# EAGLE board BMS Slave changes_vf (EAGLE 9.6.2)
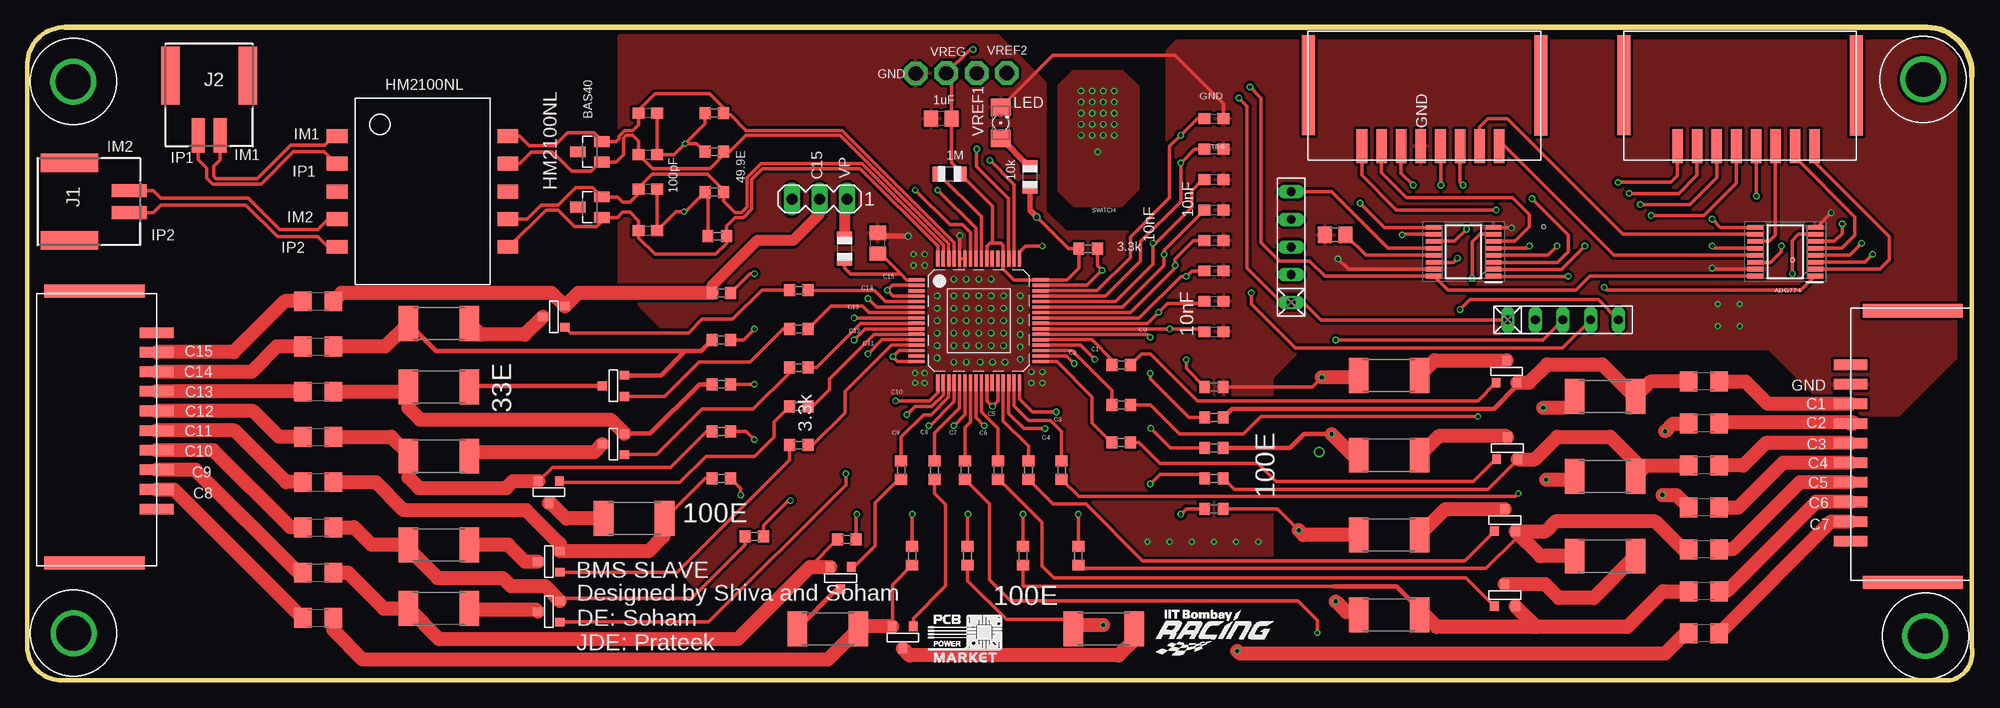
[diagram p0: board, top side]
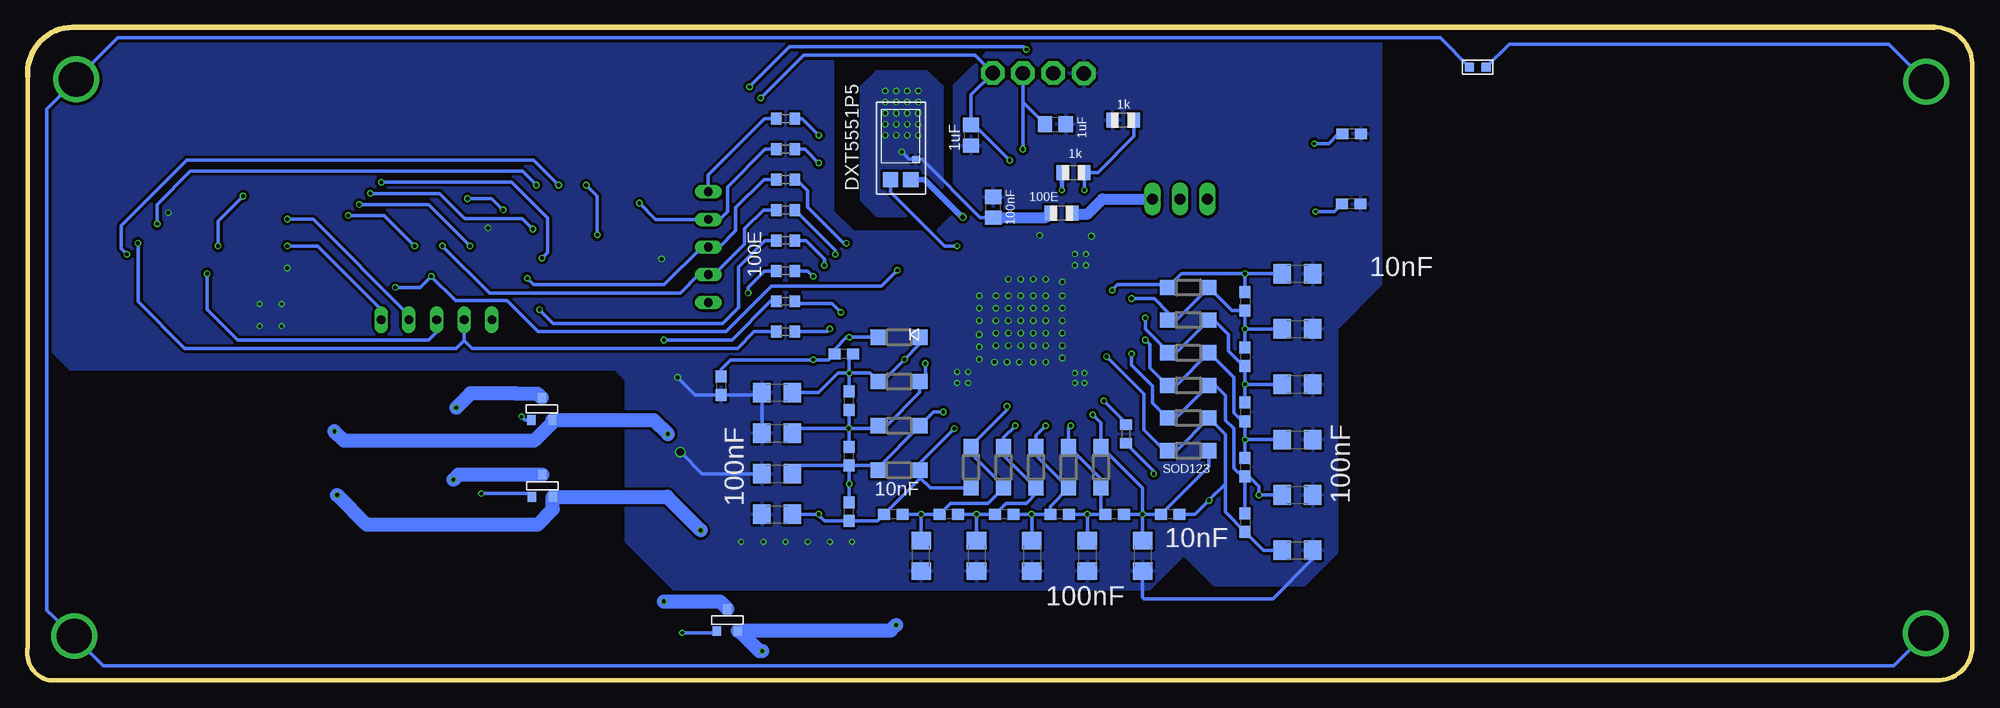
[diagram p1: board, bottom side, seen from below]

Size 178.49 x 59.96 mm. Coordinates in mm from the lower left corner, seen from the top.
Outline: 3.49,59.94 173.92,59.94 arc-100 178.43,55.37 178.43,3.05 arc-90 176.46,0 3.24,0 arc-90 0,3.05 0,56.64 arc-90 3.49,59.94
Copper layers (1*16): Top 0.035mm / dielectric 1.5mm / Bottom 0.035mm
Design rules "PCB_Power": minimum track width 5mil, minimum drill 10mil, track to track 5mil, track to pad 5mil, pad to pad 5mil, via to via 5mil, smd to smd 5mil, copper to edge 10mil, drill to drill 6mil, minimum pad ring 5mil, minimum via ring 5mil, stop-mask expansion 3mil, vias tented up to drill 0mil, thermal gap 10mil

## Footprints (pad centres in the part's own frame; a part is rotated, then mirrored left to right if it is on the bottom)
C0805 = smd 1.3 x 1.5: 1 -0.95,0; 2 0.95,0
C0603 = smd 1.1 x 1: 1 -0.85,0; 2 0.85,0
SOD123 = smd 1.4 x 1.4: A 1.9,0; C -1.9,0
SOP64P600X175-16N = smd 1.52 x 0.44: 1 -2.715,2.24; 2 -2.715,1.6; 3 -2.715,0.96; 4 -2.715,0.32; 5 -2.715,-0.32; 6 -2.715,-0.96; 7 -2.715,-1.6; 8 -2.715,-2.24; 9 2.715,-2.24; 10 2.715,-1.6; 11 2.715,-0.96; 12 2.715,-0.32; 13 2.715,0.32; 14 2.715,0.96; 15 2.715,1.6; 16 2.715,2.24
R0603 = smd 1 x 1.1: 1 -0.85,0; 2 0.85,0
C1206 = smd 1.6 x 1.8: 1 -1.4,0; 2 1.4,0
SOT23 = smd 1 x 1.4: 1 -0.95,-1.1; 2 0.95,-1.1; 3 0,1.1
5023520200 = smd 1.2 x 3.2: 1 -1,-1; 2 1,-1 | smd 1.7 x 5.3: 3 -3.55,-6.48; 4 3.55,-6.48
1206 = smd 1.6 x 1.803: A -1.422,0; C 1.422,0
SOT-23 = smd 0.787 x 0.889: 1 0.025,-1.016; 2 -0.94,1.016; 3 0.991,1.016
R2512 = smd 1.8 x 3.2: 1 -2.8,0; 2 2.8,0
R0805 = smd 1.1 x 1.4: 1 -1,0; 2 1,0
R0603' = smd 0.889 x 0.889: 1 0,0.762; 2 0,-0.762
R0805' = smd 1.3 x 1.5: 1 -0.95,0; 2 0.95,0
RN-5 = drill 0.813 long: 1 -5.08,0; 2 -2.54,0; 3 0,0; 4 2.54,0; 5 5.08,0
MA03-1 = drill 1.016 long: 1 -2.54,0; 2 0,0; 3 2.54,0
P1-13 = drill 1.321 pad 2.159 octagon: TP 0,0
HM2100NL = smd 1.27 x 1.89: 1 -5.08,-7.84; 2 -2.54,-7.84; 3 0,-7.84; 4 2.54,-7.84; 5 5.08,-7.84; 6 5.08,7.84; 7 2.54,7.84; 8 0,7.84; 9 -2.54,7.84; 10 -5.08,7.84
DXT5551P5 = smd 1.4 x 1.39: B -0.9,-1.534; E 0.94,-1.534 | smd 0.635 x 0.635: C 1.384,0.33
LTC6813 = smd 1.5 x 0.3: C0 5.7,-1.25; C1 5.7,-2.25; C2 5.7,-3.25; C11 -5.7,-3.75; C12 -5.7,-2.75; C13 -5.7,-1.75; C14 -5.7,-0.75; C15 -5.7,0.25; C16 -5.7,1.25; C17 -5.7,2.25; C18 -5.7,3.25; GPIO1 5.7,-0.75; GPIO2 5.7,-0.25; GPIO3 5.7,0.25; GPIO4 5.7,0.75; GPIO5 5.7,1.25; GPIO6 5.7,1.75; GPIO7 5.7,2.25; GPIO8 5.7,2.75; GPIO9 5.7,3.25; S1 5.7,-1.75; S2 5.7,-2.75; S3 5.7,-3.75; S12 -5.7,-3.25; S13 -5.7,-2.25; S14 -5.7,-1.25; S15 -5.7,-0.25; S16 -5.7,0.75; S17 -5.7,1.75; S18 -5.7,2.75; V+ -5.7,3.75; VREG 5.7,3.75 | smd 0.3 x 1.5: C3 3.75,-5.7; C4 2.75,-5.7; C5 1.75,-5.7; C6 0.75,-5.7; C7 -0.25,-5.7; C8 -1.25,-5.7; C9 -2.25,-5.7; C10 -3.25,-5.7; CSB(IMA) -2.25,5.7; DRIVE 3.75,5.7; DTEN 2.25,5.7; IBIAS -0.25,5.7; ICMP -0.75,5.7; IMB -3.25,5.7; IPB -3.75,5.7; ISOMB 0.75,5.7; S4 3.25,-5.7; S5 2.25,-5.7; S6 1.25,-5.7; S7 0.25,-5.7; S8 -0.75,-5.7; S9 -1.75,-5.7; S10 -2.75,-5.7; S11 -3.75,-5.7; SCK(IPA) -2.75,5.7; SDI(NC) 1.75,5.7; SDO(NC) 1.25,5.7; V- -1.75,5.7; V-- -1.25,5.7; VREF1 2.75,5.7; VREF2 3.25,5.7; WDT 0.25,5.7
1X10NANOMQS = smd 0.97 x 3.1: P$1 -1.8,0; P$2 0,0; P$3 1.8,0; P$4 3.6,0; P$5 5.4,0; P$6 7.2,0; P$7 9,0; P$8 10.8,0; P$9 12.6,0; P$10 14.4,0 | smd 1.2 x 9.2: P$11 -6.75,5.7; P$12 18.2,5.7
NEWBMS = smd 0.97 x 3.1: P$1 17.54,1.28; P$2 15.74,1.28; P$3 13.94,1.28; P$4 12.14,1.28; P$5 10.34,1.28; P$6 8.54,1.28; P$7 6.74,1.28; P$8 4.94,1.28 | smd 1.2 x 9.2: P$9 0.016,6.89; P$10 21.352,6.858
1206' = smd 1.6 x 1.8: 1 -1.4,0; 2 1.4,0

## Placement (x,y rotation side)
C1  1uF  [C0805]  83.88,51.56 180 top
C2  100pF  [C0603]  56.96,41.27 0 top
C3  100pF  [C0603]  56.96,45.09 180 top
C4  10nF  [C0603]  56.98,43.74 180 bottom
C5  100pF  [C0603]  56.96,48.26 0 top
C6  100pF  [C0603]  56.96,52.07 180 top
C8  10nF  [C0603]  56.96,50.16 180 bottom
C173  100nF  [C0805]  89.85,43.43 90 bottom
C175  1uF  [C0805]  84.14,51.05 0 bottom
C176  100nF  [C0805]  78.04,40.13 90 top
C177  1uF  [C0805]  91.88,50.04 270 bottom
D1  [SOD123]  98.49,31.5 180 bottom
D2  [SOD123]  98.49,27.43 180 bottom
D3  [SOD123]  98.49,23.37 180 bottom
D4  [SOD123]  98.49,19.3 180 bottom
D5  [SOD123]  91.88,19.56 270 bottom
D7  [SOD123]  88.9,19.56 270 bottom
D8  [SOD123]  85.91,19.56 270 bottom
D9  [SOD123]  82.93,19.56 270 bottom
D10  [SOD123]  79.94,19.56 270 bottom
D11  [SOD123]  71.94,21.08 0 bottom
D12  [SOD123]  71.94,24.08 0 bottom
D13  [SOD123]  71.94,27.08 0 bottom
D14  [SOD123]  71.94,30.07 0 bottom
D15  [SOD123]  71.94,33.07 0 bottom
D16  [SOD123]  71.94,36.07 0 bottom
DEMUX1  ADG774ABRQZ  [SOP64P600X175-16N]  131.81,39.34 180 top
DEMUX2  ADG774ABRQZ  [SOP64P600X175-16N]  161.33,39.34 180 top
E0  100E  [R0603]  108.9,26.92 180 top
E1  100E  [R0603]  108.9,24.13 180 top
E2  100E  [R0603]  108.9,21.34 180 top
E3  100E  [R0603]  108.9,18.54 180 top
E4  100E  [R0603]  108.9,15.75 180 top
E5  100E  [R0603]  96.45,11.43 90 top
E7  100E  [R0603]  91.37,11.43 90 top
E8  100E  [R0603]  86.29,11.43 90 top
E9  100E  [R0603]  81.21,11.43 90 top
E10  100E  [R0603]  75.22,12.93 0 top
E11  100E  [R0603]  66.74,13.21 0 top
E12  100E  [R0603]  63.69,18.54 0 top
E13  100E  [R0603]  63.69,22.86 0 top
E14  100E  [R0603]  63.69,27.18 0 top
E15  100E  [R0603]  63.69,31.24 0 top
E16  100E  [R0603]  63.69,35.56 0 top
E18  100E  [R0603]  108.9,40.39 0 bottom
E19  100E  [R0603]  108.9,37.59 0 bottom
E20  100E  [R0603]  108.9,34.8 0 bottom
E21  100E  [R0603]  108.9,32 0 bottom
E22  100E  [R0603]  108.9,43.18 0 bottom
E23  100E  [R0603]  108.9,45.97 0 bottom
E24  100E  [R0603]  108.9,48.77 0 bottom
E25  100E  [R0603]  108.9,51.56 0 bottom
F1  100nF  [C1206]  109.66,26.42 0 bottom
F2  100nF  [C1206]  109.66,22.69 0 bottom
F3  100nF  [C1206]  109.66,18.97 0 bottom
F4  100nF  [C1206]  109.66,15.24 0 bottom
F5  100nF  [C1206]  96.45,11.43 90 bottom
F7  100nF  [C1206]  91.37,11.43 270 bottom
F8  100nF  [C1206]  86.29,11.43 270 bottom
F9  100nF  [C1206]  81.21,11.43 270 bottom
F10  100nF  [C1206]  76.13,11.43 270 bottom
F11  100nF  [C1206]  61.91,11.94 0 bottom
F12  100nF  [C1206]  61.91,17.02 0 bottom
F13  100nF  [C1206]  61.91,22.1 0 bottom
F14  100nF  [C1206]  61.91,27.18 0 bottom
F15  100nF  [C1206]  61.91,32.26 0 bottom
F16  100nF  [C1206]  61.91,37.34 0 bottom
IM1  BAS40-05  [SOT23]  51.62,48.51 90 top
IM2  BAS40-05  [SOT23]  51.62,43.43 90 top
J1  502352-0200  [5023520200]  10.35,43.94 270 top
J2  502352-0200  [5023520200]  16.7,49.02 180 top
K1  3.3K  [R0603]  100.39,28.96 0 top
K2  3.3K  [R0603]  100.39,25.27 0 top
K3  3.3K  [R0603]  100.39,21.84 0 top
K4  3.3K  [R0603]  94.93,19.3 270 top
K5  3.3K  [R0603]  91.88,19.3 270 top
K7  3.3K  [R0603]  89.09,19.3 90 top
K8  3.3K  [R0603]  86.04,19.3 90 top
K9  3.3K  [R0603]  83.25,19.3 90 top
K10  3.3K  [R0603]  80.2,19.3 90 top
K11  3.3K  [R0603]  77.66,22.62 90 bottom
K12  3.3K  [R0603]  70.8,21.59 0 top
K13  3.3K  [R0603]  70.8,25.15 0 top
K14  3.3K  [R0603]  70.8,28.7 0 top
K15  3.3K  [R0603]  70.8,32.26 0 top
K16  3.3K  [R0603]  70.8,35.81 180 top
K17  3.3K  [R0603]  97.34,39.62 180 top
LED1  [1206]  89.34,51.18 90 top
M1  [SOT-23]  135.77,28.35 180 top
M2  [SOT-23]  131.25,24.92 180 bottom
M3  [SOT-23]  135.85,21.31 180 top
M4  [SOT-23]  131.2,17.86 180 bottom
M5  [SOT-23]  135.62,14.71 180 top
M7  [SOT-23]  135.62,7.82 180 top
M8  [SOT-23]  114.21,5.54 180 bottom
M9  [SOT-23]  80.33,3.94 0 top
M10  [SOT-23]  74.61,9.4 0 top
M11  [SOT-23]  47.86,6.35 270 top
M12  [SOT-23]  47.86,10.92 270 top
M13  [SOT-23]  47.83,17.27 0 top
M14  [SOT-23]  53.78,21.72 270 top
M15  [SOT-23]  53.78,27.05 270 top
M16  [SOT-23]  48.32,33.4 270 top
P0  33E  [R2512]  124.97,27.99 180 top
P1  33E  [R2512]  144.79,26.06 0 top
P2  33E  [R2512]  124.97,20.67 180 top
P3  33E  [R2512]  144.79,18.73 0 top
P4  33E  [R2512]  124.97,13.34 180 top
P6  33E  [R2512]  144.79,11.4 180 top
P7  33E  [R2512]  124.97,6.02 0 top
P8  33E  [R2512]  98.79,4.72 180 top
P9  33E  [R2512]  73.47,4.72 0 top
P10  33E  [R2512]  37.78,6.6 180 top
P11  33E  [R2512]  37.78,12.45 180 top
P12  33E  [R2512]  55.69,14.86 0 top
P13  33E  [R2512]  37.78,20.57 180 top
P14  33E  [R2512]  37.78,26.92 180 top
P15  33E  [R2512]  37.78,32.77 180 top
R1  5k  [R0805]  92.01,46.23 270 top
R2  OE  [R0603']  45.37,56.29 90 bottom
R3  100K  [R0805']  120.03,40.89 180 top
R157  100E  [R0805]  83.58,42.9 0 bottom
R159  1k  [R0805]  82.48,46.61 180 bottom
R160  1k  [R0805]  77.91,51.44 0 bottom
R161  100E  [R0805]  74.99,39.62 90 top
R162  1M  [R0805]  84.64,46.48 0 top
RM1  49.9E  [R0603]  63.05,44.83 180 top
RM2  49.9E  [R0603]  63.31,40.77 0 top
RM3  49.9E  [R0603]  63.05,48.51 0 top
RM4  49.9E  [R0603]  63.05,52.07 180 top
RN2  10k  [RN-5]  140.93,33.1 0 top
RN3  10k  [RN-5]  115.99,39.78 90 top
SV1  [MA03-1]  72.7,44.2 180 top
T0  10nF  [C0603]  114.82,27.05 270 bottom
T1  10nF  [C0603]  103.57,29.97 180 bottom
T2  10nF  [C0603]  103.06,25.65 90 bottom
T3  10nF  [C0603]  103.06,20.57 90 bottom
T4  10nF  [C0603]  103.06,15.49 90 bottom
T5  10nF  [C0603]  98.99,15.24 180 bottom
T7  10nF  [C0603]  93.91,15.24 180 bottom
T8  10nF  [C0603]  88.83,15.24 180 bottom
T9  10nF  [C0603]  83.75,15.24 180 bottom
T10  10nF  [C0603]  78.67,15.24 180 bottom
T11  10nF  [C0603]  73.59,15.24 180 bottom
T12  10nF  [C0603]  66.74,14.48 270 bottom
T13  10nF  [C0603]  66.74,19.56 270 bottom
T14  10nF  [C0603]  66.74,24.64 270 bottom
T15  10nF  [C0603]  66.74,29.72 270 bottom
T16  10nF  [C0603]  66.74,34.8 270 bottom
T18  10nF  [C0603]  108.9,40.39 0 top
T19  10nF  [C0603]  108.9,37.59 0 top
T20  10nF  [C0603]  108.9,34.8 0 top
T21  10nF  [C0603]  108.9,32 0 top
T22  10nF  [C0603]  108.9,43.18 0 top
T23  10nF  [C0603]  108.9,45.97 0 top
T24  10nF  [C0603]  108.9,48.77 0 top
T25  10nF  [C0603]  108.9,51.56 0 top
TP1  TPPAD1-13  [P1-13]  89.88,55.75 0 top
TP6  TPPAD1-13  [P1-13]  84.33,55.74 0 top
TP7  TPPAD1-13  [P1-13]  87.12,55.74 0 top
TP8  TPPAD1-13  [P1-13]  81.53,55.73 0 top
U$1  HM2100NL  [HM2100NL]  36.28,44.88 270 top
U$2  DXT5551P5  [DXT5551P5]  98.36,47.5 0 bottom
U$3  LTC6813  [LTC6813]  87.31,33.02 0 top
U$4  [IITBR_LOGO]  103.52,2.22 0 top
U$5  1X10NANOMQS  [1X10NANOMQS]  11.87,17.53 90 top
U$6  1X10NANOMQS  [1X10NANOMQS]  167.32,27.18 270 top
U$7  LOGO_PCBPOWER  [270X170]  82.61,1.65 0 top
U$8  NEWBMS  [NEWBMS]  117.54,47.75 0 top
U$9  PTC-FUSE  [1206']  26.68,34.8 0 top
U$10  NEWBMS  [NEWBMS]  146.49,47.75 0 top
U$13  PTC-FUSE  [1206']  26.68,30.65 0 top
U$14  PTC-FUSE  [1206']  26.68,26.5 0 top
U$15  PTC-FUSE  [1206']  26.68,22.34 0 top
U$16  PTC-FUSE  [1206']  26.68,18.19 0 top
U$17  PTC-FUSE  [1206']  26.68,14.04 0 top
U$18  PTC-FUSE  [1206']  26.68,9.89 0 top
U$19  PTC-FUSE  [1206']  26.68,5.74 0 top
U$20  PTC-FUSE  [1206']  153.86,4.32 180 top
U$21  PTC-FUSE  [1206']  153.86,8.17 180 top
U$23  PTC-FUSE  [1206']  153.86,12.02 180 top
U$24  PTC-FUSE  [1206']  153.86,15.87 180 top
U$25  PTC-FUSE  [1206']  153.86,19.73 180 top
U$26  PTC-FUSE  [1206']  153.86,23.58 180 top
U$27  PTC-FUSE  [1206']  153.86,27.43 180 top

## Library data of the parts
C1 C173 C175-C177 R1 R157 R159-R162 = IIT_BOMBAY_Racing
C2-C6 C8 T0 T1-T5 T7-T16 T18-T25 = resistor; MID: GCD188R71H103KA01D
D1-D5 D7-D16 IM1 IM2 = diode
DEMUX1 DEMUX2 = SamacSys_Parts; DESCRIPTION: ADG774ABRQZ analogue switch, QSOP16 Analog Devices ADG774ABRQZ, Analogue Switch Quad 2:1, 3.3 V, 5 V, 16-Pin QSOP; HEIGHT: 1.75mm; MANUFACTURER_NAME: Analog Devices; MANUFACTURER_PART_NUMBER: ADG774ABRQZ; MOUSER_PART_NUMBER: 584-ADG774ABRQZ; MOUSER_PRICE-STOCK: https://www.mouser.co.uk/ProductDetail/Analog-Devices/ADG774ABRQZ?qs=BpaRKvA4VqET7XGcXCMwIA%3D%3D
E0 E1-E5 E7-E16 E18-E25 = resistor; MID: MCT06030C1000FP500
F1-F5 F7-F16 = rcl; SPICEPREFIX: C
J1 J2 = SamacSys_Parts; DESCRIPTION: Molex DURACLIK 502352, 2mm Pitch, 2 Way, 1 Row, Right Angle PCB Header, Surface Mount; HEIGHT: mm; MANUFACTURER_NAME: Molex; MANUFACTURER_PART_NUMBER: 502352-0200; MOUSER_PART_NUMBER: 538-502352-0200; MOUSER_PRICE-STOCK: https://www.mouser.co.uk/ProductDetail/Molex/502352-0200?qs=cPOO8qjhL6OPJnOOkJoW%252Bw%3D%3D
K1-K5 K7-K17 = resistor; MID: CRCW06033K30FKEB
LED1 = led
M1-M5 M7-M16 = zetex; MID: BSS308PEH6327XT; OC_FARNELL: unknown; OC_NEWARK: unknown
P0 P1-P4 P6-P15 = resistor; MID: CRCW251233R0FKEGHP
R2 = IIT_BOMBAY_Racing (2)
R3 = rcl; SPICEPREFIX: R
RM1-RM4 = resistor; MID: CRCW0603120RFKEAHP
RN2 RN3 = resistor-net; MID: 4605X-101-103LF; OC_FARNELL: unknown; OC_NEWARK: unknown
SV1 = con-lstb; OC_FARNELL: unknown; OC_NEWARK: unknown
TP1 TP6-TP8 = testpad
U$1 = HM2100NL
U$2 = DXT5551P5
U$3 = 6813
U$4 = Rachit IITB Racing
U$5 U$6 = IIT_BOMBAY_Racing2
U$7 = logo_pcbpower
U$8 U$10 = NEWBMS
U$9 U$13-U$21 U$23-U$27 = IIT_BOMBAY_Racing; MID: 0466.200NRHF

## Nets
C: C173.1 R157.1 U$2.C
C01: E1.1 M1.2 P1.2 U$27.2
C02: E2.1 M2.2 P2.2 U$26.2
C03: E3.1 M3.2 P3.2 U$25.2
C04: E4.1 M4.2 P4.2 U$24.2
C05: E5.1 M5.2 P6.2 U$23.2
C06: E7.1 M7.2 P7.2 U$21.2
C07: E8.1 M8.2 P8.2 U$20.2
C08: E9.1 M9.2 P9.2 U$19.2
C09: E10.1 M10.2 P10.2 U$18.2
C10: E11.1 M11.2 P11.2 U$17.2
C11: E12.1 M12.2 P12.2 U$16.2
C12: E13.1 M13.2 P13.2 U$15.2
C13: E14.1 M14.2 P14.2 U$14.2
C14: E15.1 M15.2 P15.2 U$13.2
C15: E16.1 M16.2 SV1.2 U$9.2
C_01: U$6.P$3 U$27.1
C_02: U$6.P$4 U$26.1
C_03: U$6.P$5 U$25.1
C_04: U$6.P$6 U$24.1
C_05: U$6.P$7 U$23.1
C_06: U$6.P$8 U$21.1
C_07: U$6.P$9 U$20.1
C_08: U$5.P$2 U$19.1
C_09: U$5.P$3 U$18.1
C_10: U$5.P$4 U$17.1
C_11: U$5.P$5 U$16.1
C_12: U$5.P$6 U$15.1
C_13: U$5.P$7 U$14.1
C_14: U$5.P$8 U$13.1
C_15: U$5.P$9 U$9.1
C_17: D16.C E16.2 F16.1 T16.1 U$3.C17 U$3.C18
C_18: D15.C D16.A E15.2 F15.1 T15.1 T16.2 U$3.C16
C_20: D14.C D15.A E14.2 F14.1 T14.1 T15.2 U$3.C15
C_21: K10.1 M10.3
C_22: D13.C D14.A E13.2 F13.1 T13.1 T14.2 U$3.C14
C_23: D9.C D10.A E9.2 F9.1 T9.1 T10.2 U$3.C9
C_24: D12.C D13.A E12.2 F12.1 T12.1 T13.2 U$3.C13
C_26: D8.C D9.A E8.2 F8.1 T8.1 T9.2 U$3.C8
C_27: D10.C D11.A E10.2 F10.1 T10.1 T11.2 U$3.C10
C_28: D11.C D12.A E11.2 F11.1 T11.1 T12.2 U$3.C11 U$3.C12
C_30: D7.C D8.A E7.2 F7.1 T7.1 T8.2 U$3.C7
C_33: D5.C D7.A E5.2 F5.2 T5.1 T7.2 U$3.C5 U$3.C6
C_35: D4.C D5.A E4.2 F4.2 T4.1 T5.2 U$3.C4
C_37: D3.C D4.A E3.2 F3.2 T3.1 T4.2 U$3.C3
C_38: D2.C D3.A E2.2 F2.2 T2.1 T3.2 U$3.C2
C_41: D1.A E0.2 T0.1 T1.2 U$3.C0
C_42: D1.C D2.A E1.2 F1.2 T1.1 T2.2 U$3.C1
D13: K13.2 U$3.S14
GND: C1.2 C4.1 C8.1 C173.2 C175.2 C176.2 C177.2 DEMUX1.8 DEMUX1.15 DEMUX2.8 DEMUX2.15 E0.1 F1.1 F2.1 F3.1 F4.1 F5.1 F7.2 F8.2 F9.2 F10.2 F11.2 F12.2 F13.2 F14.2 F15.2 F16.2 LED1.C P0.2 R3.2 R160.1 T0.2 T18.2 T19.2 T20.2 T21.2 T22.2 T23.2 T24.2 T25.2 TP8.TP U$3.V- U$3.V-- U$6.P$2 U$8.P$5
GND1: R2.1
GND2: R2.2
ISO_1_IN_N: C3.2 IM2.2 RM1.1 U$1.7 U$3.IMB
ISO_1_IN_P: C2.1 IM2.1 RM2.2 U$1.6 U$3.IPB
ISO_1_N: J1.1 U$1.4
ISO_1_P: J1.2 U$1.5
ISO_2_IN_N: C6.2 IM1.2 RM4.1 U$1.10 U$3.CSB(IMA)
ISO_2_IN_P: C5.1 IM1.1 RM3.2 U$1.9 U$3.SCK(IPA)
ISO_2_N: J2.1 U$1.1
ISO_2_P: J2.2 U$1.2
N$2: DEMUX1.13 R3.1
N$3: C2.2 C3.1 C4.2 RM1.2 RM2.1
N$6: K15.2 U$3.S16
N$7: C5.2 C6.1 C8.2 RM3.1 RM4.2
N$8: R162.1 U$3.WDT
N$9: E18.2 T18.1 U$3.GPIO4
N$10: E19.2 T19.1 U$3.GPIO3
N$11: E20.2 T20.1 U$3.GPIO2
N$12: E21.2 T21.1 U$3.GPIO1
N$13: K8.2 U$3.S8
N$14: R159.1 R160.2 U$3.ICMP
N$17: E23.2 T23.1 U$3.GPIO6
N$18: E24.2 T24.1 U$3.GPIO7
N$19: E25.2 T25.1 U$3.GPIO8
N$22: E22.2 T22.1 U$3.GPIO5
N$25: K16.2 M16.3
N$31: M16.1 P15.1
N$37: K15.1 M15.3
N$41: M15.1 P14.1
N$47: K14.1 M14.3
N$52: M14.1 P13.1
N$54: K13.1 M13.3
N$55: M13.1 P12.1
N$58: K12.1 M12.3
N$59: M12.1 P11.1
N$60: K11.1 M11.3
N$61: M11.1 P10.1
N$65: M10.1 P9.1
N$68: K9.1 M9.3
N$69: M9.1 P8.1
N$72: M8.1 P7.1
N$74: K7.2 U$3.S7
N$75: M7.1 P6.1
N$76: K16.1 U$3.S17
N$81: K5.2 M5.3
N$82: M5.1 P4.1
N$83: K2.1 U$3.S2
N$84: K4.2 M4.3
N$85: M4.1 P3.1
N$87: K3.2 M3.3
N$88: M3.1 P2.1
N$90: K2.2 M2.3
N$91: M2.1 P1.1
N$94: K1.2 M1.3
N$95: M1.1 P0.1
N$97: K14.2 U$3.S15
N$99: K12.2 U$3.S13
N$100: K11.2 U$3.S11
N$101: K10.2 U$3.S10
N$102: K9.2 U$3.S9
N$103: K8.1 M8.3
N$104: K7.1 M7.3
N$106: K5.1 U$3.S5
N$107: K4.1 U$3.S4
N$108: K3.1 U$3.S3
N$110: K1.1 U$3.S1
N$227: U$2.B U$3.DRIVE
N$241: R159.2 U$3.IBIAS
N$246: C176.1 R161.1 U$3.V+
P_TEMP1: DEMUX2.2 U$10.P$1
P_TEMP2: DEMUX2.5 U$10.P$2
P_TEMP3: DEMUX2.11 U$10.P$3
P_TEMP4: DEMUX2.14 U$10.P$4
P_TEMP5: DEMUX1.2 U$10.P$5
P_TEMP6: DEMUX1.5 U$10.P$6
P_TEMP7: DEMUX1.11 U$10.P$7
P_TEMP8: DEMUX1.14 U$10.P$8
P_TEMP9: DEMUX2.3 U$8.P$4
P_TEMP10: DEMUX2.6 U$8.P$3
P_TEMP11: DEMUX2.10 U$8.P$2
P_TEMP12: DEMUX2.13 U$8.P$1
P_TEMP13: DEMUX1.3 U$8.P$8
P_TEMP14: DEMUX1.6 U$8.P$7
P_TEMP15: DEMUX1.10 U$8.P$6
R: LED1.A R1.1
SWITCH_TEMP: DEMUX1.1 DEMUX2.1 K17.1 U$3.GPIO9
TEMP1: DEMUX2.4 E21.1 RN2.2
TEMP2: DEMUX2.7 E20.1 RN2.3
TEMP3: DEMUX2.9 E19.1 RN2.4
TEMP4: DEMUX2.12 E18.1 RN2.5
TEMP5: DEMUX1.4 E22.1 RN3.2
TEMP6: DEMUX1.7 E23.1 RN3.3
TEMP7: DEMUX1.9 E24.1 RN3.4
TEMP8: DEMUX1.12 E25.1 RN3.5
VP: R157.2 R161.2 SV1.1
VREF1: C175.1 TP7.TP U$3.VREF1
VREF2: C177.1 RN2.1 RN3.1 TP1.TP U$3.VREF2
VREG: C1.1 DEMUX1.16 DEMUX2.16 K17.2 R1.2 R162.2 TP6.TP U$2.E U$3.DTEN U$3.ISOMB U$3.VREG

## Tracks (layer width: path | path; a pad name or v marks a point on that pad's centre or on a via)
C  (via drill 0.35)
  Bottom 0.305: v98.23,48.51 97.55,47.83 U$2.C 96.39,47.83 91.05,42.48 C173.1
  Bottom 1.016: C173.1 89.84,42.49 84.98,42.49 R157.1
  other vias: 98.74,52.07 99.76,52.07 96.71,53.09 97.72,52.07 97.72,51.05 98.74,51.05 99.76,51.05 97.72,50.04 98.74,50.04 96.71,50.04 99.76,50.04 99.76,53.09 98.74,53.09 97.72,53.09 99.76,54.1 98.74,54.1 97.72,54.1 96.71,54.1 96.71,51.05 96.71,52.07
  pour Top (isolate 0.254): 95.95,55.88 100.52,55.88 101.92,54.48 101.92,45.09 100.39,43.56 96.07,43.56 94.68,44.96 94.68,54.61
  pour Bottom (isolate 0.254): 95.95,55.88 100.52,55.88 101.92,54.48 101.92,44.07 100.52,42.67 95.95,42.67 94.55,44.07 94.55,54.48
C01
  Top 0.406: E1.1 110.54,24.92 134.58,24.92 136.71,27.05 M1.2
  Top 1.27: U$27.2 | U$27.2 148.96,27.43 P1.2 147.48,26.06 144.54,29.01 139.48,29.01 137.8,27.33 M1.2
C02  (via drill 0.35, 0.35 pad 0.6)
  Top 0.406: v119.69,22.61 117.16,22.61 115.89,21.34 E2.1
  Top 1.27: U$26.2 151.02,23.58 v150.3,22.86 | P2.2 121.63,20.67 v119.69,22.61
  Bottom 0.406: M2.2 130.31,23.65
  Bottom 1.27: M2.2 120.99,23.9 v119.69,22.61 | 130.31,23.65 131.98,21.98 149.43,21.98 v150.3,22.86
C03
  Top 0.305: E3.1 110.77,17.53 134.02,17.53 M3.2
  Top 1.27: M3.2 138.34,20.3 140.4,22.35 145.27,22.35 147.59,20.04 P3.2 148.59,19.73 U$25.2
C04  (via drill 0.35 pad 0.6)
  Top 0.305: v116.68,13.77 114.7,15.75 E4.1
  Top 1.27: v116.68,13.77 117.11,13.34 P4.2 | v150.05,17.02 151.31,17.02 U$24.2
  Bottom 1.27: v150.05,17.02 147.32,14.29 131.67,14.29 130.26,15.7 M4.2 119.76,16.84 v116.68,13.77
C05
  Top 0.305: E5.1 96.78,10.26 133.87,10.26 136.56,12.95 M5.2
  Top 1.27: U$23.2 151.95,12.02 149.4,14.58 140.24,14.58 139.36,13.69 M5.2 138.85,11.41 P6.2
C06
  Top 0.305: E7.1 91.37,8.69 91.45,8.61 119.93,8.61
  Top 0.406: 119.93,8.61 125.65,8.61 127.93,6.33 127.93,6.18 P7.2
  Top 1.27: 138.47,4.9 146.83,4.9 150.1,8.17 U$21.2 | M7.2 138.47,4.9 | 138.47,4.9 129.35,4.9 127.93,6.33
C07  (via drill 0.35)
  Top 0.305: E8.1 86.29,9.14 89.85,5.59 95.13,5.59 P8.2
  Top 0.406: P8.2 96.35,5.08
  Top 1.27: U$20.2 152.17,4.32 150.29,2.44 111.29,2.44 v111.03,2.69 | 96.35,5.08 v98.74,5.08
  Bottom 1.27: v111.03,2.69 111.31,2.69 113.14,4.52 M8.2 113.27,4.57 99.25,4.57 v98.74,5.08
C08
  Top 0.305: E9.1 79.39,8.75 M9.2
  Top 1.27: M9.2 76.49,4.95 P9.2 73.45,1.91 30.8,1.91 28.08,4.62 U$19.2
C09
  Top 0.305: E10.1 74.33,12.93 71.82,10.41
  Top 1.27: M10.2 71.82,10.41 65.21,3.81 37.77,3.81 P10.2 32.69,6.6 29.41,9.89 U$18.2
C10
  Top 0.305: M11.2 49.13,7.54 60.98,7.54 65.89,12.45 E11.1
  Top 1.27: U$17.2 29.99,14.04 31.59,12.45 P11.2 34.98,12.06 37.65,9.4 43.62,9.4 44.36,8.66 47.5,8.66 M11.2
C11
  Top 0.305: E12.1 62.2,18.54 58.52,14.86 P12.2
  Top 0.406: P12.2 58.36,14.73
  Top 1.27: 58.36,14.73 58.36,13.21 57.01,11.86 M12.2 48.87,12.53 45.78,15.62 34.55,15.62 31.98,18.19 U$16.2
C12
  Top 0.305: M13.2 46.92,18.29 48.19,19.56 59.03,19.56 62.33,22.86 E13.1
  Top 1.27: U$15.2 33.41,22.34 34.98,20.78 P13.2 34.98,18.62 35.95,17.65 43.95,17.65 44.59,18.29 M13.2
C13
  Top 0.406: E14.1 61.7,27.18 57.17,22.66 M14.2
  Top 1.27: M14.2 53.53,23.93 36.05,23.93 34.98,24.99 P14.2 34.55,26.5 U$14.2
C14
  Top 0.406: 60.39,30.23 37.52,30.23 P15.2 | 60.39,30.23 58.15,27.99 M15.2 | 60.39,30.23 61.82,30.23 E15.1
  Top 1.27: P15.2 32.86,30.65 U$13.2
C15
  Top 1.016: E16.1 62.84,36.23 66.99,40.39 70.27,40.39 72.7,42.82 SV1.2
  Top 1.27: U$9.2 28.84,35.56 48.12,35.56 M16.2 50.56,35.56 E16.1
C_01
  Top 1.27: U$27.1 157.67,27.43 159.72,25.38 U$6.P$3
C_02
  Top 1.27: U$6.P$4 167.51,23.58 167.61,23.67 155.35,23.67 U$26.1
C_03
  Top 1.27: U$6.P$5 159.52,21.78 157.47,19.73 U$25.1
C_04
  Top 1.27: U$6.P$6 161.11,19.98 157.01,15.88 U$24.1
C_05
  Top 1.27: U$6.P$7 162.67,18.18 156.51,12.02 U$23.1
C_06
  Top 1.27: U$6.P$8 164.53,16.38 164.16,16.38 155.95,8.17 U$21.1
C_07
  Top 1.27: U$20.1 165.52,14.58 U$6.P$9
C_08
  Top 1.27: U$19.1 25.23,5.74 13.45,17.53 U$5.P$2
C_09
  Top 1.27: U$18.1 24.87,9.89 15.43,19.33 U$5.P$3
C_10
  Top 1.27: U$17.1 24.17,14.04 17.08,21.13 U$5.P$4
C_11
  Top 1.27: U$16.1 23.75,18.19 19.02,22.93 U$5.P$5
C_12
  Top 1.27: U$15.1 23.1,22.34 20.72,24.73 U$5.P$6
C_13
  Top 1.27: U$14.1 25.25,26.53 U$5.P$7
C_14
  Top 1.27: U$13.1 22.91,30.65 20.59,28.33 U$5.P$8
C_15
  Top 1.27: U$9.1 23.63,34.8 18.96,30.13 U$5.P$9
C_17  (via drill 0.35)
  Top 0.305: U$3.C18 79.38,36.27 v78.93,35.81 79.47,35.27 U$3.C17 | E16.2 66.32,37.34 v66.74,37.34
  Bottom 0.305: D16.C 74.1,36.32 78.42,36.32 v78.93,35.81 | F16.1 v66.74,37.34 | D16.C 72.58,37.34 v66.74,37.34 | D16.C | T16.1 v66.74,37.34
C_18  (via drill 0.35)
  Top 0.305: v66.74,32.26 65.72,31.24 E15.2 | v77.15,35.05 77.93,34.27 U$3.C16
  Bottom 0.305: v66.74,32.26 T16.2 67.92,33.95 D16.A 73.04,33.07 D15.C 73.84,33.83 75.06,35.05 v77.15,35.05 | v66.74,32.26 F15.1 | T15.1 v66.74,32.26
C_20  (via drill 0.35)
  Top 0.305: v66.74,27.18 E14.2 | U$3.C15 78.93,33.27 v75.88,33.27
  Bottom 0.305: v66.74,27.18 F14.1 | v66.74,27.18 T15.2 66.9,28.87 68.26,30.23 68.26,31.75 69.58,33.07 D15.A 73.04,30.07 D14.C 73.84,30.22 75.88,32.26 v75.88,33.27 | T14.1 v66.74,27.18
C_21
  Top 0.305: M10.3 75.86,10.41 77.78,12.34 77.78,16.3 79.94,18.45 K10.1
C_22  (via drill 0.35)
  Top 0.305: U$3.C14 81.6,32.26 76.9,32.26 v75.88,31.24 | E13.2 65.97,22.86 v66.74,22.1
  Bottom 0.305: v75.88,31.24 75.45,30.81 75.45,28.68 D13.C 73.04,27.08 D14.A 67.75,27.78 67.75,24.55 66.99,23.79 T14.2 v66.74,22.1 | F13.1 v66.74,22.1 | v66.74,22.1 T13.1
C_23  (via drill 0.35)
  Top 0.305: U$3.C9 85.06,25.59 82.84,23.37 v82.74,23.37 | E9.2 v81.21,15.24
  Bottom 0.305: v82.74,23.37 82.93,23.18 D9.C 79.94,18.47 D10.A 79.94,15.66 T10.2 T9.1 v81.21,15.24 F9.1
C_24  (via drill 0.35)
  Top 0.305: v65.47,17.02 65.47,17.61 E12.2 | v77.15,29.97 78.45,31.27 U$3.C13
  Bottom 0.305: T13.2 T12.1 | T13.2 66.39,18.71 65.47,17.78 v65.47,17.02 F12.1 | T13.2 66.99,18.71 67.75,19.47 67.75,23.11 68.51,23.88 68.51,26.16 69.43,27.08 D13.A 70.09,27.08 73.09,24.08 D12.C 75.25,25.48 75.25,27.03 77.15,28.93 v77.15,29.97
C_26  (via drill 0.35)
  Top 0.305: U$3.C8 86.06,24.4 v85.02,23.37 | v86.33,15.24 86.29,15.2 E8.2
  Bottom 0.305: F8.1 86.29,15.2 v86.33,15.24 T8.1 T9.2 84.6,15.98 D9.A 85.91,20.64 D8.C 85.91,22.48 v85.02,23.37 | v85.02,23.37
C_27  (via drill 0.35)
  Top 0.305: U$3.C10 84.06,26.21 82.99,25.15 81.47,25.15 v80.71,24.38 | E10.2 76.07,15.18 v76.13,15.24
  Bottom 0.305: T10.1 v76.13,15.24 | v76.13,15.24 F10.1 | D11.A 70.04,19.64 T11.2 v76.13,15.24 | v76.13,15.24 76.13,17.65 D10.C 79.94,23.62 v80.71,24.38
C_28  (via drill 0.35)
  Top 0.305: v70.04,16.51 69.87,16.51 67.59,14.22 E11.2 | U$3.C12 79.99,30.27 v79.44,29.72 79.88,29.27 U$3.C11
  Bottom 0.305: F11.1 65.05,11.94 T12.2 68.55,15.44 68.55,18.03 | 68.55,18.03 68.55,22.59 D12.A 73.04,21.08 D11.C 74.1,21.08 76.01,22.99 76.01,26.29 v79.44,29.72 | 68.55,18.03 70.04,16.55 v70.04,16.51 71.31,15.24 T11.1
C_30  (via drill 0.35)
  Top 0.305: v91.37,15.24 E7.2 | v87.82,23.37 87.06,24.13 U$3.C7
  Bottom 0.305: F7.1 v91.37,15.24 T7.1 T8.2 88.67,16.26 86.8,16.26 85.91,17.14 D8.A 88.9,20.64 D7.C 88.9,22.29 v87.82,23.37
C_33  (via drill 0.35)
  Top 0.305: E5.2 v96.45,15.24 | U$3.C6 88.07,27.31 88.07,25.65 v88.58,25.15 89.06,25.63 U$3.C5
  Bottom 0.305: v96.45,15.24 T5.1 | F5.2 v96.45,15.24 | v88.58,25.15 88.58,24.81 91.88,21.51 D5.C 92.34,21 92.34,21.29 88.9,17.84 D7.A 90.3,16.26 93.75,16.26 T7.2 v96.45,15.24
C_35  (via drill 0.35)
  Top 0.305: U$3.C4 90.06,24.5 91.45,23.11 v93.41,23.11 | v105.85,15.24 106.36,15.75 E4.2
  Bottom 0.305: D5.A 95.62,17.66 96.59,18.63 D4.C | D4.C 96.59,18.5 T5.2 100.44,14.64 T4.1 105.34,14.64 105.85,15.15 v105.85,15.24 F4.2 | v93.41,23.11 96.59,19.93 D4.C
C_37  (via drill 0.35)
  Top 0.305: E3.2 107.67,18.92 103.95,18.92 v103.06,18.03 | U$3.C3 91.06,25.82 92.24,24.64 v94.42,24.64
  Bottom 0.305: F3.2 107.5,19.72 T3.1 | v94.42,24.64 95.32,24.64 D3.C 100.39,19.57 D4.A 100.81,19.72 T3.1 | T4.2 v103.06,18.03 T3.1
C_38  (via drill 0.35)
  Top 0.305: E2.2 104.9,21.34 v103.11,23.13 | U$3.C2 95.39,29.77 v96.07,29.08
  Bottom 0.305: F2.2 107.83,23.13 v103.11,23.13 103.06,23.18 T2.1 103.06,23.11 | 103.06,23.11 T3.2 | v96.07,29.08 96.07,27.69 96.33,27.43 D2.C 96.59,26.41 99.62,23.37 D3.A 100.64,23.11 103.06,23.11
C_41  (via drill 0.35)
  Top 0.305: E0.2 106.36,28.61 v106.36,29.43 | v103.06,31.5 102.78,31.77 U$3.C0
  Bottom 0.305: T0.1 114.82,28.54 113.93,29.43 v106.36,29.43 104.96,29.43 T1.2 104.42,30.39 103.31,31.5 v103.06,31.5 D1.A
C_42  (via drill 0.35)
  Top 0.305: U$3.C1 96.67,30.77 v97.98,29.46 | E1.2 106.61,24.13 103.06,27.69 v103.06,28.19
  Bottom 0.305: D1.C 96.59,30.86 v97.98,29.46 100.01,27.43 D2.A 101.15,28.19 v103.06,28.19 | F1.2 105.85,26.42 104.07,28.19 v103.06,28.19 | T2.2 v103.06,28.19 | T1.1 103.06,29.63 v103.06,28.19
D13
  Top 0.305: U$3.S14 81.59,31.75 77.71,31.75 73.62,27.66 73.62,26.7 72.07,25.15 K13.2
GND  (via drill 0.3, 0.35, 0.35 pad 0.6, 0.4, 0.65)
  Top 0.305: U$3.V-- U$3.V- 85.56,40.82 v85.58,40.84 | LED1.C 94.14,57.4 105.31,57.4 109.75,52.96 T25.2 | DEMUX2.15 154.62,37.75 v154.62,37.85 | DEMUX1.8 136.15,41.59 v136.2,41.53 | DEMUX1.15 121.22,37.75 v120.28,38.68 | v118.81,27.81 117.92,26.92 E0.1 | DEMUX2.8 164.2,41.59 v165.54,42.93
  Top 0.508: v80.83,40.77 78.35,40.77 C176.2
  Top 1.27: P0.2 121.99,27.81 v118.81,27.81
  Bottom 0.305: F2.1 F1.1 111.28,26.2 T0.2 117.19,26.2 v118.81,27.81 | F3.1 116.56,18.96 v118.55,20.96 | F11.2 60.51,11.18 64.2,7.49 76.01,7.49 76.13,7.62 F10.2
  other vias: 85.02,35.31 86.17,35.31 87.31,35.31 88.45,35.31 89.6,35.31 88.45,34.16 89.6,34.16 87.31,34.16 86.17,34.16 85.02,34.16 85.02,33.02 86.17,33.02 88.45,33.02 89.6,33.02 89.6,31.88 88.45,31.88 87.31,31.88 86.17,31.88 85.02,31.88 85.02,30.73 86.17,30.73 87.31,30.73 88.45,30.73 89.6,30.73 83.5,30.73 83.5,29.59 83.5,33.02 83.5,31.88 83.5,35.31 83.5,34.16 83.5,36.58 85.02,36.83 86.17,36.83 87.31,36.83 88.45,36.83 91.12,35.31 91.12,34.16 91.12,33.02 91.12,31.75 91.12,30.61 89.72,29.21 91.12,29.46 87.44,29.21 88.58,29.21 85.02,29.21 86.17,29.21 87.31,33.02 82.36,27.3 82.36,28.19 81.47,28.19 81.47,27.3 93.15,28.32 93.15,27.3 92.14,27.3 92.14,28.32 82.36,38.1 81.34,38.1 82.36,39.12 81.34,39.12 110.93,12.7 106.87,12.7 108.9,12.7 112.96,12.7 155.13,34.54 157.16,34.54 157.16,32.51 155.13,32.51 102.8,12.7 104.84,12.7
  pour Top (isolate 0.254): 54.29,59.18 54.29,36.32 58.35,32.26 58.35,11.56 61.28,8.64 69.4,8.64 72.45,11.68 76.52,11.68 79.69,8.51 112.2,8.51 114.23,10.54 114.23,27.81 116.9,30.48 159.57,30.48 159.7,30.61 165.92,24.38 171.76,24.38 176.97,29.59 176.97,57.15 175.45,58.67 105.47,58.67 104.58,57.78 104.58,43.05 102.68,41.15 95.31,41.15 93.41,43.05 93.41,54.86 89.09,59.18
  pour Bottom (isolate 0.254): 54.29,59.18 54.29,36.32 58.35,32.26 58.35,11.68 61.28,8.76 69.53,8.76 72.32,11.56 75.5,8.38 119.19,8.38 123.5,12.7 123.5,27.56 124.52,28.57 174.56,28.57 176.84,30.86 176.84,57.28 175.32,58.8 105.6,58.8 104.58,57.78 104.58,43.05 102.68,41.15 95.06,41.15 93.41,42.8 93.41,54.61 88.83,59.18
GND1  (via drill 3.2)
  Bottom 0.305: v4.25,4.32 7.22,1.35 171.52,1.35 174.18,4 v174.18,4.06 176.72,6.42 176.72,52.43 v173.97,55.17 170.17,58.98 48.83,58.98 R2.1
GND2  (via drill 3.2)
  Bottom 0.305: v4.23,54.97 7.68,58.42 42.48,58.42 R2.2
ISO_1_IN_N
  Top 0.305: U$3.IMB 84.06,39.98 76.62,47.42 67.32,47.42 66.05,46.15 66.05,43.43 65.54,42.93 64.96,42.93 63.9,43.98 RM1.1 63.9,45 62.42,46.48 57.34,46.48 56.11,45.25 C3.2 56.2,45.09 56.2,44.79 55.31,43.9 54.64,43.9 54.16,44.38 IM2.2 51.9,45.21 50.3,45.21 48.7,43.61 47.18,43.61 45.89,42.32 44.14,42.32 U$1.7
ISO_1_IN_P
  Top 0.305: U$3.IPB 83.56,39.87 76.44,46.99 67.5,46.99 66.48,45.97 66.48,43.25 65.72,42.49 64.96,42.49 64.16,41.69 RM2.2 64.16,40.09 63.18,39.12 57.59,39.12 56.11,40.6 C2.1 56.11,42.16 55.31,42.96 54.64,42.96 54.16,42.48 IM2.1 52.72,42.12 52.26,41.66 50.23,41.66 48.7,43.18 47.61,43.18 44.23,39.8 U$1.6
ISO_1_N
  Top 0.305: J1.1 11.56,44.94 12.24,44.26 20.29,44.26 23.18,41.38 26.66,41.38 27.62,42.34 U$1.4
ISO_1_P
  Top 0.305: J1.2 11.56,42.94 12.24,43.62 20.06,43.62 22.97,40.72 26.66,40.72 27.57,39.8 U$1.5
ISO_2_IN_N
  Top 0.305: U$1.10 45.17,49.96 46.04,49.09 48.37,49.09 49.58,50.29 52,50.29 52.72,49.57 IM1.2 54.03,49.46 54.29,49.72 54.29,49.96 54.8,50.47 55.56,50.47 56.11,51.02 C6.2 56.11,52.36 57.59,53.85 60.31,53.85 62.63,53.85 63.9,52.58 RM4.1 64.05,51.92 64.52,51.92 65.97,50.47 74.79,50.47 85.06,40.2 U$3.CSB(IMA)
ISO_2_IN_P
  Top 0.305: U$1.9 45.17,47.42 46.22,48.48 48.19,48.48 49.93,46.74 51.75,46.74 52.58,47.56 IM1.1 54.03,47.56 54.72,48.25 54.72,49.78 54.98,50.04 55.56,50.04 56.11,49.49 C5.1 57.38,46.99 62.67,46.99 64.2,48.51 | U$3.SCK(IPA) 84.56,40.09 74.61,50.04 65.97,50.04 64.45,48.51 64.2,48.51 | 64.2,48.51 RM3.2
ISO_2_N
  Top 0.305: J2.1 17.7,47.81 17.09,47.21 17.09,46.29 17.31,46.08 21.12,46.08 24.17,49.12 27.29,49.12 28.13,49.96 U$1.1
ISO_2_P
  Top 0.305: J2.2 15.7,47.81 16.48,47.03 16.48,46.09 17.03,45.54 21.45,45.54 24.42,48.51 27.24,48.51 28.34,47.42 U$1.2
N$2
  Top 0.305: DEMUX1.13 122.84,39.02 R3.1
N$3  (via drill 0.3)
  Top 0.305: RM2.1 62.46,44.58 RM1.2 60.4,43.03 v60.26,43.03 59.56,43.03 C2.2 C3.1
  Bottom 0.305: v60.26,43.03 58.54,43.03 C4.2
N$6
  Top 0.305: U$3.S16 77.23,33.77 76.65,34.35 73.74,34.35 K15.2
N$7  (via drill 0.3)
  Top 0.305: v60.39,49.28 59.37,48.26 C5.2 C6.1 | v60.39,49.28 61.44,49.28 RM3.1 | RM4.2 62.2,51.09 v60.39,49.28
  Bottom 0.305: v60.39,49.28 59.04,49.28 58.15,50.16 C8.2
N$8
  Top 0.305: R162.1 87.56,42.56 U$3.WDT
N$9  (via drill 0.35)
  Top 0.305: U$3.GPIO4 101.26,33.77 105.34,37.86 v105.34,38.1 105.34,38.7 107.03,40.39 T18.1
  Bottom 0.305: v105.34,38.1 105.34,38.7 107.03,40.39 T18.1
N$10  (via drill 0.35)
  Top 0.305: U$3.GPIO3 102.04,33.27 105.85,37.08 v106.36,37.08 106.87,37.59 T19.1
  Bottom 0.305: v106.36,37.08 106.87,37.59 T19.1
N$11  (via drill 0.35)
  Top 0.305: U$3.GPIO2 102.81,32.77 v103.82,33.78 104.61,34.57 107.83,34.57 T20.1
  Bottom 0.305: T20.1 107.83,34.57 104.61,34.57 v103.82,33.78
N$12  (via drill 0.35)
  Top 0.305: U$3.GPIO1 104.82,32.27 v104.84,32.26 107.88,32.26 108.05,32.09 T21.1
  Bottom 0.305: T21.1 105.09,32 v104.84,32.26
N$13
  Top 0.305: K8.2 86.04,23.2 86.55,23.71 86.55,24.05 86.56,24.07 U$3.S8
N$14  (via drill 0.3)
  Top 0.305: v81.48,45.02 84.69,41.83 85.83,41.83 86.56,41.09 U$3.ICMP
  Bottom 0.305: v81.48,45.02 v81.48,45.03 R159.1 80.24,46.61 76.91,49.94 R160.2
N$17  (via drill 0.35)
  Top 0.305: U$3.GPIO6 99.86,34.77 103.31,38.23 v103.31,40.13 103.57,40.13 106.87,43.43 106.87,44.96 107.86,45.95 108.05,45.95 T23.1
  Bottom 0.305: v103.31,40.13 103.57,40.13 106.87,43.43 106.87,44.96 107.88,45.97 T23.1
N$18  (via drill 0.35)
  Top 0.305: U$3.GPIO7 98.96,35.27 102.17,38.48 102.17,40.26 105.88,43.97 105.88,47.47 v105.85,47.5 107.12,48.77 T24.1
  Bottom 0.305: v105.85,47.5 107.12,48.77 T24.1
N$19  (via drill 0.35)
  Top 0.305: T25.1 107.38,51.56 v105.85,50.04 104.84,49.02 104.84,44.32 101.22,40.7 101.22,38.8 98.19,35.77 U$3.GPIO8
  Bottom 0.305: v105.85,50.04 107.38,51.56 T25.1
N$22  (via drill 0.35)
  Top 0.305: U$3.GPIO5 100.5,34.27 104.33,38.1 v104.33,39.12 104.33,39.46 E22.2
  Bottom 0.305: v104.33,39.12 104.33,39.46 E22.2
N$25
  Top 0.305: M16.3 49.84,31.9 60.67,31.9 61.91,33.15 64.74,33.15 67.41,35.81 K16.2
N$31
  Top 1.27: P15.1 41.62,31.73 45.65,31.73 M16.1
N$37
  Top 0.305: M15.3 58.51,26.06 61.66,29.21 66.31,29.21 69.36,32.26 K15.1
N$41
  Top 0.406: M15.1 40.83,27.03 40.65,26.85 P14.1
N$47
  Top 0.305: M14.3 57.74,20.73 61.91,24.89 66.61,24.89 69.95,28.23 K14.1
N$52
  Top 1.27: P13.1 40.94,20.93 52,20.93 M14.1
N$54
  Top 0.305: M13.3 48.95,18.16 59.88,18.16 62.29,20.57 66.74,20.57 68.51,22.35 68.51,23.71 K13.1
N$55
  Top 1.27: P12.1 49.46,14.86 48.06,16.26 M13.1
N$58
  Top 0.305: M12.3 59.65,9.93 69.95,20.23 K12.1
N$59
  Top 1.27: P11.1 44.13,12.45 45.68,10.9 M12.1
N$60  (via drill 0.35)
  Top 0.305: v75.12,18.96 75.12,17.95 62.53,5.36 M11.3
  Bottom 0.305: K11.1 75.12,19.23 v75.12,18.96
N$61
  Top 1.27: M11.1 46.69,6.48 40.71,6.48 P10.1
N$65
  Top 0.406: P9.1 74.33,8.38 M10.1
N$68
  Top 0.305: K9.1 83.25,17.14 84.26,16.13 84.26,8.66 81.32,5.71 M9.3
N$69
  Top 1.27: M9.1 80.98,2.29 100.14,2.29 101.59,3.73 P8.1
N$72  (via drill 0.35)
  Top 1.27: P7.1 121.91,6.27 121.04,6.27 v120.08,7.24
  Bottom 1.27: v120.08,7.24 114.92,7.24 M8.1
N$74
  Top 0.305: U$3.S7 87.56,24.64 89.09,23.11 K7.2
N$75
  Top 1.27: P6.1 143.75,7.57 140.55,7.57 139.28,8.84 M7.1
N$76
  Top 0.305: U$3.S17 78.75,34.77 77.73,35.79 71.67,35.79 K16.1
N$81
  Top 0.305: M5.3 131.93,10.98 102.36,10.98 97.15,16.19 94.14,16.19 K5.2
N$82
  Top 1.27: M5.1 130.15,15.72 P4.1
N$83
  Top 0.305: K2.1 99.54,26.61 95.88,30.27 U$3.S2
N$84  (via drill 0.3)
  Top 0.305: K4.2 96.49,16.89 136.56,16.89 v136.81,17.14
  Bottom 0.305: M4.3 132.5,17.14 v136.81,17.14
N$85  (via drill 0.35)
  Top 1.27: P3.1 141.67,18.41 v139.38,18.41
  Bottom 1.27: M4.1 138.92,18.87 v139.38,18.41
N$87
  Top 0.305: K3.2 102,21.84 103.93,19.91 112.92,19.91 114.57,18.26 132.71,18.26 134.74,20.3 M3.3
N$88
  Top 1.27: P2.1 129.53,22.43 135.72,22.43 M3.1
N$90  (via drill 0.3)
  Top 0.305: v133.13,24.21 133.11,24.23 113.22,24.23 111.59,22.61 105.72,22.61 103.06,25.27 K2.2
  Bottom 0.305: v133.13,24.21 132.83,23.9 M2.3
N$91  (via drill 0.35)
  Top 0.406: P1.1 140.95,25.02
  Top 1.27: 140.95,25.02 v139.13,25.02
  Bottom 0.406: 133.62,26.31 133.64,26.34
  Bottom 1.27: 133.62,26.31 131.66,26.31 M2.1 | v139.13,25.02 137.81,26.34 133.64,26.34
N$94
  Top 0.305: M1.3 133.11,25.65 107.38,25.65 103.06,29.97 102.26,29.97 K1.2
N$95
  Top 1.27: P0.1 129.14,29.36 M1.1
N$97
  Top 0.305: K14.2 72.41,28.7 76.48,32.77 U$3.S15
N$99
  Top 0.305: U$3.S13 79.29,30.77 75.03,26.5 75.03,24.55 72.07,21.59 K12.2
N$100  (via drill 0.35)
  Top 0.305: U$3.S11 83.56,26.43 82.79,25.65 v79.69,25.65
  Bottom 0.305: v79.69,25.65 77.66,23.62 K11.2
N$101
  Top 0.305: U$3.S10 84.56,26 82.94,24.38 82.23,24.38 80.2,22.35 K10.2
N$102
  Top 0.305: U$3.S9 85.56,25.02 83.25,22.71 K9.2
N$103  (via drill 0.3)
  Top 0.305: K8.1 88.3,16.19 88.3,9.25 90.24,7.3 116.58,7.3 118.37,5.51 v118.37,4.37
  Bottom 0.305: v118.37,4.37 115.35,4.37 M8.3
N$104
  Top 0.305: K7.1 89.18,18.45 93.13,14.5 93.13,10.49 94.22,9.4 132.04,9.4 M7.3
N$106
  Top 0.305: K5.1 91.88,21.5 89.56,23.82 U$3.S5
N$107
  Top 0.305: U$3.S4 90.56,25.2 91.88,23.88 93.91,23.88 94.93,22.86 K4.1
N$108
  Top 0.305: K3.1 99.5,21.84 97.72,23.62 97.72,26.04 94.49,29.27 U$3.S3
N$110
  Top 0.305: U$3.S1 97.7,31.27 99.54,29.43 K1.1
N$227  (via drill 0.3)
  Top 0.305: v93.15,39.88 91.63,39.88 91.06,39.31 U$3.DRIVE
  Bottom 0.305: v93.15,39.88 94.3,39.88 99.26,44.84 U$2.B
N$241  (via drill 0.3)
  Top 0.305: v83.55,45.01 87.06,41.5 U$3.IBIAS
  Bottom 0.406: v83.55,45.01 83.55,46.54 R159.2
N$246
  Top 0.305: R161.1 74.99,37.86 75.55,37.31 80.17,37.31 | C176.1 78.29,39.18 80.17,37.31 | U$3.V+ 80.7,36.77 80.17,37.31
P_TEMP1
  Top 0.305: U$10.P$1 164.03,47.59 170.88,40.74 170.88,38.61 170.01,37.75 DEMUX2.2
P_TEMP2
  Top 0.305: U$10.P$2 162.23,48.01 167.73,42.52 167.73,40.89 166.5,39.66 DEMUX2.5
P_TEMP3
  Top 0.305: U$10.P$3 160.43,40.86 159.87,40.3 DEMUX2.11
P_TEMP4  (via drill 0.35)
  Top 0.305: DEMUX2.14 158.64,38.35 159.95,38.35 160.97,39.37 v160.97,39.88 | U$10.P$4 158.68,48.98 v158.68,44.45
  Bottom 0.305: v158.68,44.45 160.97,42.16 v160.97,39.88
P_TEMP5  (via drill 0.35)
  Top 0.305: U$10.P$5 156.83,45.65 153.86,42.67 v149.03,42.67 | v142.94,39.88 140.78,37.72 134.55,37.72 DEMUX1.2
  Bottom 0.305: v142.94,39.88 145.73,42.67 v149.03,42.67
P_TEMP6  (via drill 0.35)
  Top 0.305: U$10.P$6 155.03,46.13 152.59,43.69 v148.02,43.69 | DEMUX1.5 134.54,39.67 137.65,39.67 v137.86,39.88
  Bottom 0.305: v148.02,43.69 141.67,43.69 v137.86,39.88
P_TEMP7  (via drill 0.35)
  Top 0.305: U$10.P$7 153.23,46.36 151.57,44.7 v147,44.7 | v132.09,41.43 130.97,40.3 DEMUX1.11
  Bottom 0.305: v147,44.7 140.65,44.7 138.34,42.39 133.06,42.39 v132.09,41.43
P_TEMP8  (via drill 0.35)
  Top 0.305: DEMUX1.14 129.1,38.36 130.85,38.36 v131.25,38.76 | U$10.P$8 151.43,46.34 150.81,45.72 v145.98,45.72
  Bottom 0.305: v131.25,38.76 130.74,39.27 130.74,42.44 134.02,45.72 v145.98,45.72
P_TEMP9  (via drill 0.35)
  Top 0.305: DEMUX2.3 168.62,38.39 v169.35,39.12 | U$8.P$4 129.73,48.98 v129.73,45.47
  Bottom 0.305: v169.35,39.12 169.86,39.62 169.86,41.76 163.84,47.78 132.04,47.78 v129.73,45.47
P_TEMP10  (via drill 0.35)
  Top 0.305: U$8.P$3 131.48,45.75 v131.76,45.47 | v166.56,41.91 166.56,41.02 165.84,40.3 DEMUX2.6
  Bottom 0.305: v131.76,45.47 133.03,46.74 163.51,46.74 166.56,43.69 v166.56,41.91
P_TEMP11
  Top 0.305: U$8.P$2 133.28,50.79 134.05,51.56 135.82,51.56 146.44,40.95 DEMUX2.10
P_TEMP12
  Top 0.305: DEMUX2.13 145.59,39.02 135.58,49.03 U$8.P$1
P_TEMP13  (via drill 0.35)
  Top 0.305: U$8.P$8 122.48,46.37 125.66,43.18 v134.81,43.18 | v138.09,44.22 141.41,40.89 141.41,39.37 140.4,38.35 134.56,38.35 DEMUX1.3
  Bottom 0.305: v138.09,44.22 135.85,44.22 v134.81,43.18
P_TEMP14
  Top 0.305: U$8.P$7 124.28,46.6 126.55,44.32 136.31,44.32 137.86,42.77 137.86,41.66 136.5,40.3 DEMUX1.6
P_TEMP15  (via drill 0.35)
  Top 0.305: U$8.P$6 126.08,46.58 v127.19,45.47 | v126.17,40.89 126.22,40.95 DEMUX1.10
  Bottom 0.305: v127.19,45.47 126.17,44.45 v126.17,40.89
R
  Top 0.508: R1.1 91.87,47.23 LED1.A
SWITCH_TEMP  (via drill 0.35)
  Top 0.305: U$3.GPIO9 97.27,36.27 v98.64,37.64 98.19,38.09 K17.1 | DEMUX2.1 162.75,35.81 144.97,35.81 v144.71,36.07 | v141.41,37.08 134.55,37.08 DEMUX1.1
  Bottom 0.305: v98.64,37.64 100.09,36.2 110.17,36.2 114.36,32 131.62,32 134.47,34.85 139.18,34.85 v141.41,37.08 142.43,36.07 v144.71,36.07
TEMP1  (via drill 0.35)
  Top 0.305: DEMUX2.4 167.23,39.02 v168.34,40.13
  Bottom 0.305: v168.34,40.13 168.31,40.11 168.31,34.77 164.02,30.48 139.13,30.48 138.39,31.22 | RN2.2 138.39,31.22 | E21.1 111.78,32 113.31,30.48 137.65,30.48 138.39,31.22
TEMP2  (via drill 0.35)
  Top 0.305: DEMUX2.7 162.55,40.95 161.99,40.39 v161.99,37.34 | RN2.3 139.07,31.24 v120.08,31.24
  Bottom 0.305: v161.99,37.34 161.99,34.04 159.19,31.24 141.67,31.24 140.93,31.98 RN2.3 | E20.1 110.26,34.8 113.81,31.24 v120.08,31.24
TEMP3  (via drill 0.35)
  Top 0.305: DEMUX2.9 155.38,41.59 v154.62,42.34 | RN2.4 140.88,30.51 116.37,30.51 112.33,34.54 v112.33,35.56
  Bottom 0.305: v154.62,42.34 152.26,42.34 143.47,33.55 RN2.4 | E19.1 110.81,37.59 112.33,36.07 v112.33,35.56
TEMP4  (via drill 0.35)
  Top 0.305: RN2.5 144.16,34.95 132.4,34.95 v131.48,34.04 | v154.62,39.88 154.83,39.66 DEMUX2.12
  Bottom 0.305: E18.1 110.77,40.39 113.23,37.92 113.23,34.23 114.69,32.77 130.24,32.77 131.48,34.01 v131.48,34.04 | RN2.5 146.01,34.06 151.83,39.88 v154.62,39.88
TEMP5  (via drill 0.35)
  Top 0.305: DEMUX1.4 139.54,39.02 v140.4,39.88
  Bottom 0.305: v140.4,39.88 136.08,35.56 118.55,35.56 116.88,37.24 RN3.2 115.48,37.24 112.65,40.07 112.65,41.47 110.93,43.18 E22.1
TEMP6  (via drill 0.35)
  Top 0.305: v132.6,36.91 132.6,40.26 133.28,40.95 DEMUX1.7
  Bottom 0.305: v132.6,36.91 132.01,36.32 120.03,36.32 116.57,39.78 RN3.3 114.97,39.78 113.47,41.27 113.47,43.39 110.89,45.97 E23.1
TEMP7  (via drill 0.35)
  Top 0.305: v122.31,43.81 124.54,41.59 DEMUX1.9
  Bottom 0.305: v122.31,43.81 120.81,42.32 RN3.4 114.97,42.32 114.23,43.05 114.23,45.3 110.77,48.77 E24.1
TEMP8
  Top 0.305: DEMUX1.12 124.86,39.66 119.67,44.86 RN3.5
  Bottom 0.305: RN3.5 115.99,46.38 110.81,51.56 E25.1
VP
  Top 1.016: SV1.1 74.99,43.94 R161.2
  Bottom 1.016: R157.2 82.47,42.8 81.21,42.8 79.82,44.2 SV1.1
VREF1  (via drill 0.35)
  Top 0.305: U$3.VREF1 90.06,44.24 87.13,47.17 v87.13,48.77
  Bottom 0.305: C175.1 87.12,53.09 | 87.12,53.09 TP7.TP | v87.13,48.77 87.12,48.78 87.12,53.09
VREF2  (via drill 0.35)
  Top 0.305: RN2.1 118.73,33.1 117.13,34.7 RN3.1 115.1,34.7 111.95,37.85 111.95,52.7 v111.19,53.47 | U$3.VREF2 90.56,45.52 v88.33,47.75
  Bottom 0.305: v111.19,53.47 107.25,57.4 91.53,57.4 TP1.TP 91.88,53.75 91.88,51.31 | C177.1 91.88,51.31 | v88.33,47.75 91.88,51.31
VREG  (via drill 0.35, 0.45)
  Top 0.305: 88.58,40.13 89.34,40.13 89.56,39.91 U$3.DTEN 89.56,37.76 90.55,36.77 U$3.VREG 95.42,36.77 96.49,37.85 K17.2 95.56,39.62 v92.64,42.54 | 88.58,40.13 88.33,40.13 88.06,39.87 U$3.ISOMB | 88.58,40.13 88.58,43.55 R162.2 85.64,46.74 84.83,47.55 C1.1 84.83,55.23 TP6.TP 86.5,57.91 v86.8,57.91 | DEMUX2.16 143.39,37.11 142.1,35.81 130.39,35.81 DEMUX1.16 119.08,37.11 117.68,38.51 114.89,38.51 113.22,40.18 113.22,53.47 v112.2,54.48
  Top 0.508: R1.2 92.01,43.17 v92.64,42.54
  Bottom 0.305: v112.2,54.48 108.52,58.17 87.06,58.17 v86.8,57.91
  Bottom 0.508: v92.64,42.54 92.73,42.54 96.15,45.96 U$2.E

## Text on the board
tPlace: HM2100NL | 1uF | BAS40 | IM2 | IP1 | IM1 | 1M | 10k | 49.9E | 100pF | IP2 | 3.3k | 10nF | 33E | 3.3k | 100E | 100E | 100E
bPlace: 1k | 1uF | 1uF | 1k | 100nF | 100E | 100E | 10nF | SOD123 | 10nF | 100nF | 100nF | 10nF | 100nF
tNames: VREG | VREF2 | GND | VREF1 | GND | GND | LED | IM1 | T8-5 | IP1 | C15 | VP | IM2 | SWITCH | 10nF | o | 10nF | IP2 | o | C15 | C14 | ADG774 | C13 | C0 | C12 | C15 | C11 | C1 | C14 | C2 | C13 | GND | C10 | C1 | C12 | C5 | C2 | C11 | C3 | C9 | C8 | C7 | C6 | C4 | C3 | C10 | C4 | C9 | C5 | C8 | C6 | C7 | BMS SLAVE | Designed by Shiva and Soham / DE: Soham / JDE: Prateek
tValues: TVS | TVS
bValues: DXT555 | First layer - Diodes